# Altium PCB PCB_I2C.PcbDoc
Units mil, origin at the board's own origin, x right, y up, seen from the top; angles counter-clockwise.
Board outline 1889.76 x 944.88 mil, 2 copper layers (Top Layer, Bottom Layer); 7 components, 4 nets, 36 pads, 0 vias.
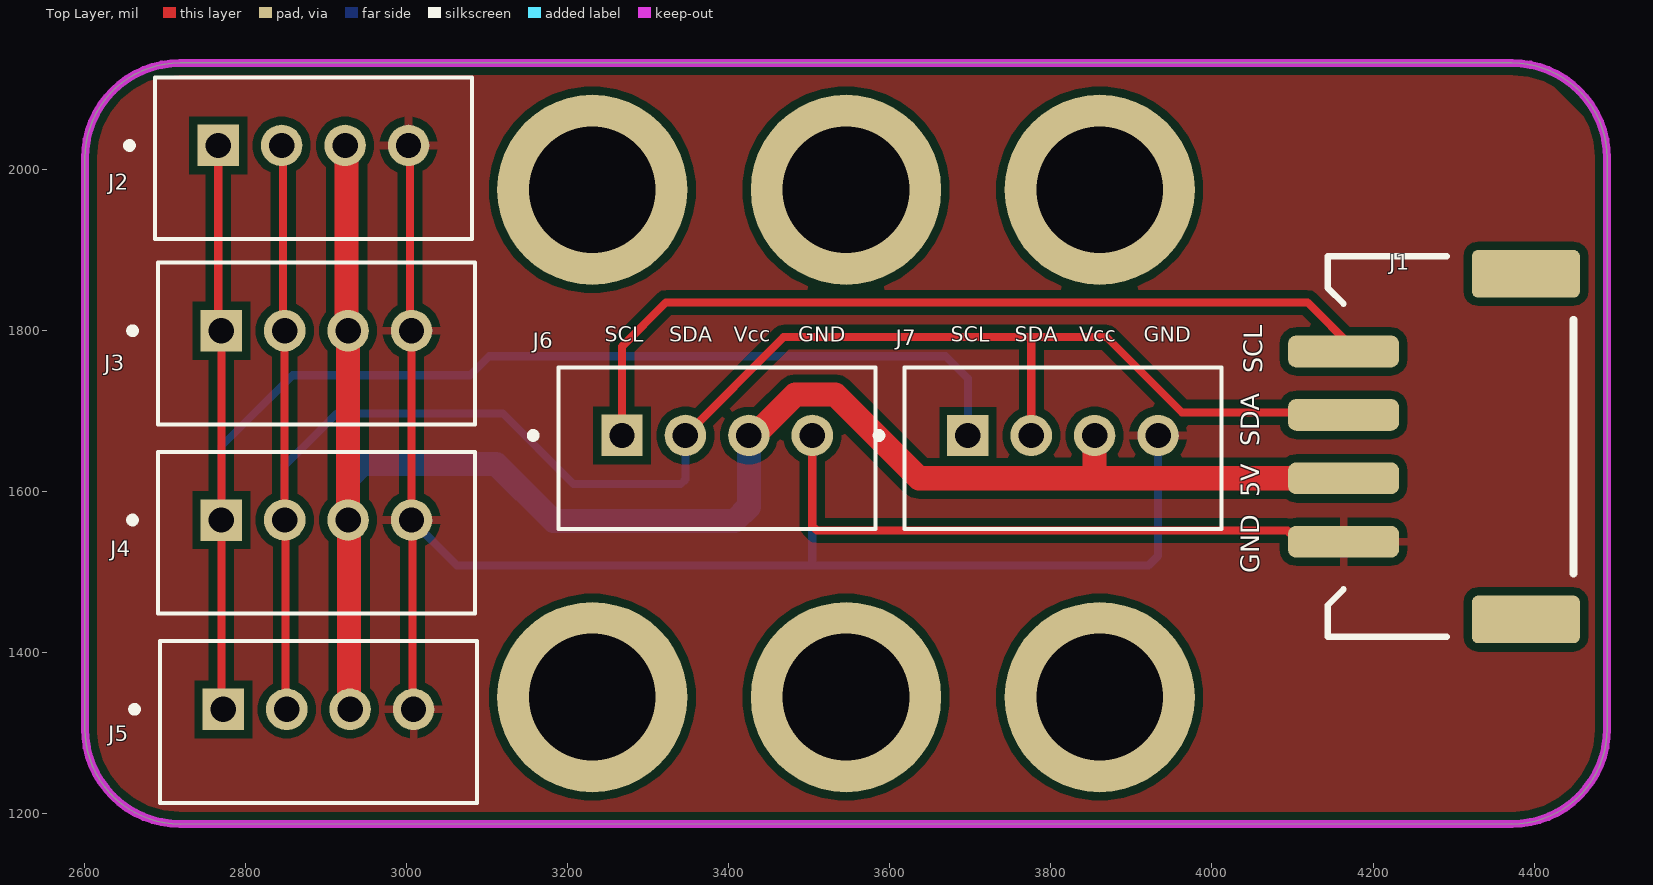
[diagram p0: Top Layer view]
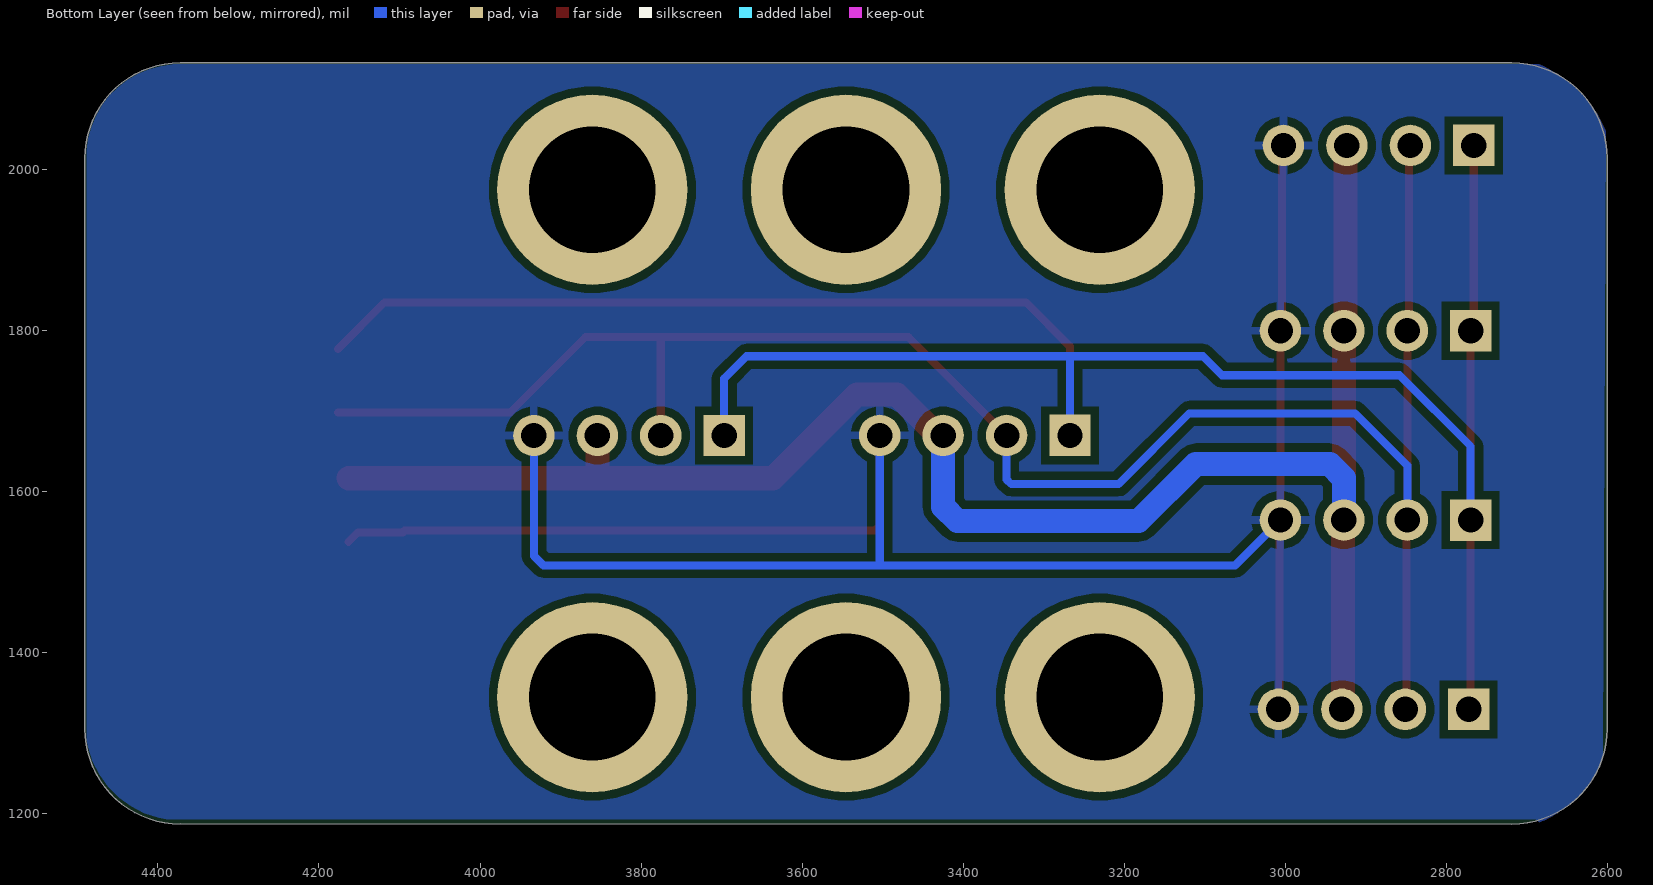
[diagram p1: Bottom Layer view, seen from below]
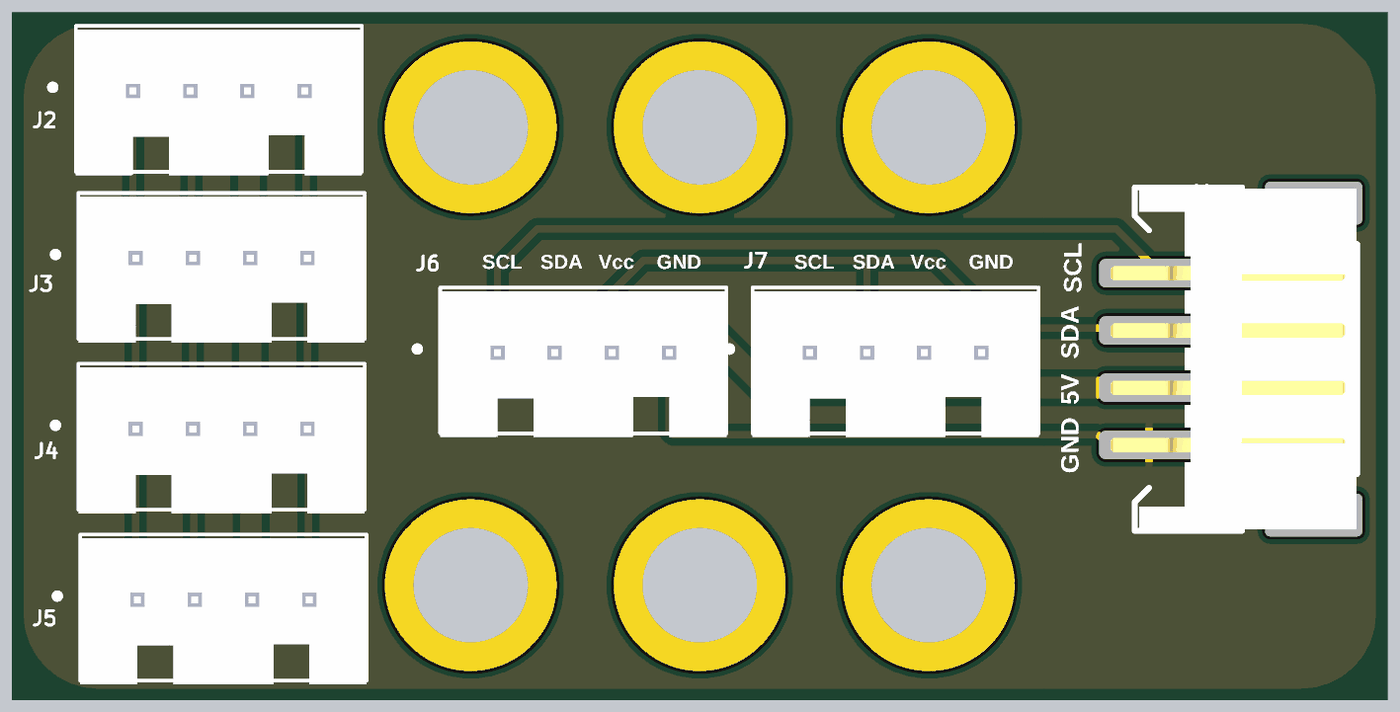
[diagram p2: 3D render of the assembled board from above, using the file's embedded part models]

## Layer stack, top to bottom
Top Solder: solder mask 0.4, Solder Resist, Dk 3.5
Top Layer: signal copper 1.4
Dielectric 1: dielectric 12.6, FR-4, Dk 4.8
Bottom Layer: signal copper 1.4
Bottom Solder: solder mask 0.4, Solder Resist, Dk 3.5

## Board outline
2600.75,1305.08 2600.75,2013.74 cw(c2718.86,2013.74) 2718.86,2131.85 4372.4,2131.85 cw(c4372.4,2013.74) 4490.51,2013.74 4490.51,1305.08 cw(c4372.4,1305.08) 4372.4,1186.97 2718.86,1186.97 cw(c2718.86,1305.08)

## Design rules (kind name [scope] priority, off if disabled: settings)
Clearance [All] p1: gap=10 ignorepadtopadclearanceinfootprint=FALSE except(0: Arc-Hole Track-Hole SMDPad-Hole THPad-Hole Via-Hole Fill-Hole Poly-Hole Region-Hole Text-Hole)
PolygonConnect [All] p1: connectstyle=Relief reliefconductorwidth=10 reliefentries=4 polygonreliefangle="90 Angle" airgapwidth=10
RoutingVias [All] p1: holewidth=28 width=50 viastyle="Through Hole" minholewidth=28 minwidth=50 maxholewidth=28 maxwidth=50
SolderMaskExpansion [All] p1: expansion=4 istentingtop=FALSE
Width [InNet('Vcc')] p1: maxlimit=30 minlimit=10 preferedwidth=10 minimp=50.000000 maximp=50.000000 favimp=50.000000
30 further rules are at their usual default settings.

## Components (designator, comment, footprint, x,y, rotation, side; value= is the part's Value field where it differs from the comment)
J1 "Grove" HDR/Header/4/2mm/BOX/SMD 4163.39,1655.51 r270 top
J2 "Grove" SEEED_110990030 2884.37,2029.37 r0 top
J3 "Grove" SEEED_110990030 2888.15,1799.37 r0 top
J4 "Grove" SEEED_110990030 2888.15,1564.37 r0 top
J5 "Grove" SEEED_110990030 2890.63,1329.37 r0 top
J6 "Grove" SEEED_110990030 3385.63,1669.37 r0 top
J7 "Grove" SEEED_110990030 3814.96,1669.29 r0 top

## Footprints (in the part's own frame and the unit in brackets; to place one, negate y for a bottom-side part, rotate by r counter-clockwise, add the part's x,y. Pads: shape width x height; smd on the part's side, far side on the other; paste and mask are expansions set on the pad)
HDR/Header/4/2mm/BOX/SMD [mm]
  rrect50% 1x3.5 smd: 1(-3,0) 2(-1,0) 3(1,0) 4(3,0)
  rrect25% 1.5x3.4 smd: SHIELD(-5.45,5.75) SHIELD(5.45,5.75)
  silkscreen extent -6,-0.5 6,7.25, body extent -5.95,-1.35 5.95,7.25, height 4.8
SEEED_110990030 [mm]
  rect 1.308x1.308 hole 0.8: 1(-3,0)
  round 1.308 hole 0.8: 2(-1,0) 3(1,0) 4(3,0)
  silkscreen extent -5.9,-2.95 5,2.15, body extent -5,-3.08 5,2.02, height 8.1

## Part data
J1: library part "Header 4", "Header, 4-Pin"
J2 J3 J4 J5 J6 J7: library part 110990030, "GROVE 2MM 4PIN VERT CONN 10PCS", PACKAGE=None, Arrow_Electronics-Purchase-URL=https://snapeda.com/shop?store=Arrow+Electronics&id=583576, Availability=Good, MF="Seeed Technology", Mouser-Purchase-URL=https://snapeda.com/shop?store=Mouser&id=583576, MP=110990030, Price=None, SnapEDA_Link=https://www.snapeda.com/parts/110990030/Seeed%20Technology%20Co.,%20Ltd/view-part/583576/?ref=snap

## Free pads (board coordinates)
  round 236.22 hole 157.48: 2(3230.67,1344.45) 2(3230.67,1974.37) 2(3545.63,1344.45) 2(3545.63,1974.37) 2(3860.59,1344.45) 2(3860.59,1974.37)

## Nets (pads, with @x,y where several pads share a name; then routed paths per layer and width w, separated by ;. In a path a pad name is that pad's centre, name@x,y a point inside that pad or via, vN(x,y) a via of type N, cw(c..) or ccw(c..) an arc to the next point about the centre after c; other vN are vias at no path point)
Gnd: J1.4 J2.4 J3.4 J4.4 J5.4 J6.4 J7.4 | length 2749
  Top Layer w10: J2.4 3004.37,2027.48 3004.37,1801.26 J3.4 J4.4 3007.5,1563.13 3007.5,1330.61 J5.4 ; J6.4 3503.74,1557.04 3509.6,1551.18 4093.63,1551.18 4095.71,1549.1 4151.69,1549.1 J1.4
  Bottom Layer w10: J4.4 3062.76,1507.87 3503.94,1507.87 ; J6.4 3503.74,1508.07 3503.94,1507.87 ; J7.4 3933.07,1519.68 3921.26,1507.87 3503.94,1507.87
SCL: J1.1 J2.1 J3.1 J4.1 J5.1 J6.1 J7.1 | length 3013.8
  Top Layer w10: J2.1 2766.26,1803.15 J3.1 J4.1 2770.04,1331.85 J5.1 ; J6.1 3267.52,1779.84 3322.32,1834.65 4118.46,1834.65 J1.1@4176.26,1776.85
  Bottom Layer w10: J4.1 2770.04,1655.87 2858.27,1744.09 3078.74,1744.09 3102.36,1767.72 3267.72,1767.72 ; J6.1 3267.52,1767.52 3267.72,1767.72 ; J7.1 3696.85,1740.16 3669.29,1767.72 3267.72,1767.72
SDA: J1.2 J2.2 J3.2 J4.2 J5.2 J6.2 J7.2 | length 2430.8
  Top Layer w10: J2.2 2846.89,2027.48 2846.89,1801.26 J3.2 J4.2 2850.02,1563.13 2850.02,1330.61 J5.2 ; J6.2 3468.23,1791.34 3779.53,1791.34 ; J7.2 3775.59,1787.4 3779.53,1791.34 ; J1.2@4176.26,1698.11 3962.52,1698.11 3869.29,1791.34 3779.53,1791.34
  Bottom Layer w10: J4.2 2848.78,1631.91 2913.72,1696.85 3119.45,1696.85 3207.43,1608.87 3340.4,1608.87 3346.26,1614.73 J6.2
Vcc: J1.3 J2.3 J3.3 J4.3 J5.3 J6.3 J7.3 | length 2241.9
  Top Layer w30: J2.3 2925.63,2027.48 2925.63,1801.26 J3.3 J4.3 2928.76,1563.13 2928.76,1330.61 J5.3 ; J6.3 3430.82,1669.37 3441.57,1680.12 3442.72,1680.12 3482.72,1720.12 3532.2,1720.12 3636.17,1616.14 3858.27,1616.14 ; J7.3 3854.33,1620.08 3858.27,1616.14 ; J1.3 3858.27,1616.14
  Bottom Layer w30: J4.3 2927.52,1616.34 2945.09,1633.92 3111.5,1633.92 3182.42,1562.99 3407.26,1562.99 3425,1580.73 J6.3
pads on no net: J1.SHIELD

## Polygon pours and split planes (outlines as drawn)
Gnd on Bottom Layer "GND_L02_P000" (solid, pour order 0): 2602.36,2047.24 cw(c2748.03,1984.25) 2685.04,2129.92 4374.02,2129.92 cw(c4374.02,2015.75) 4488.19,2015.75 4488.19,1291.34 cw(c4370.08,1311.02) 4389.76,1192.91 2688.98,1192.91 2685.04,1188.98 cw(c2739.17,1321.85) 2606.3,1267.72 2606.3,1287.4
Gnd on Top Layer "GND_L01_P001" (solid, pour order 1): 2606.52,2050.1 2610.45,2050.1 2641.95,2097.34 2689.19,2128.84 4397.86,2128.84 4484.47,2042.23 4484.47,1274.51 4451.79,1216.35 4397.86,1187.89 2693.13,1187.89 2639.91,1216.35 2606.52,1274.51

## Keep-outs
Top Layer:
  the board outline again, w10

## Silkscreen, mask and mechanical layers (free items; w line width, h text height)
Top Overlay:
  text "SCL" at 3246.26,1779.75 h31.5
  text "SDA" at 3326.26,1779.75 h31.5
  text "Vcc" at 3406.26,1779.69 h31.5
  text "GND" at 3486.26,1779.75 h31.5
  text "SCL" at 3675.39,1779.75 h31.5
  text "SDA" at 3755.39,1779.75 h31.5
  text "Vcc" at 3835.39,1779.69 h31.5
  text "GND" at 3915.39,1779.75 h31.5
  text "SCL" at 4070.39,1746.36 h39.37 r90
  text "SDA" at 4066.46,1655.81 h39.37 r90
  text "5V" at 4066.46,1592.82 h39.37 r90
  text "GND" at 4066.46,1498.33 h39.37 r90